# EAGLE board Trefferzonenmodul (EAGLE 7.2.0)
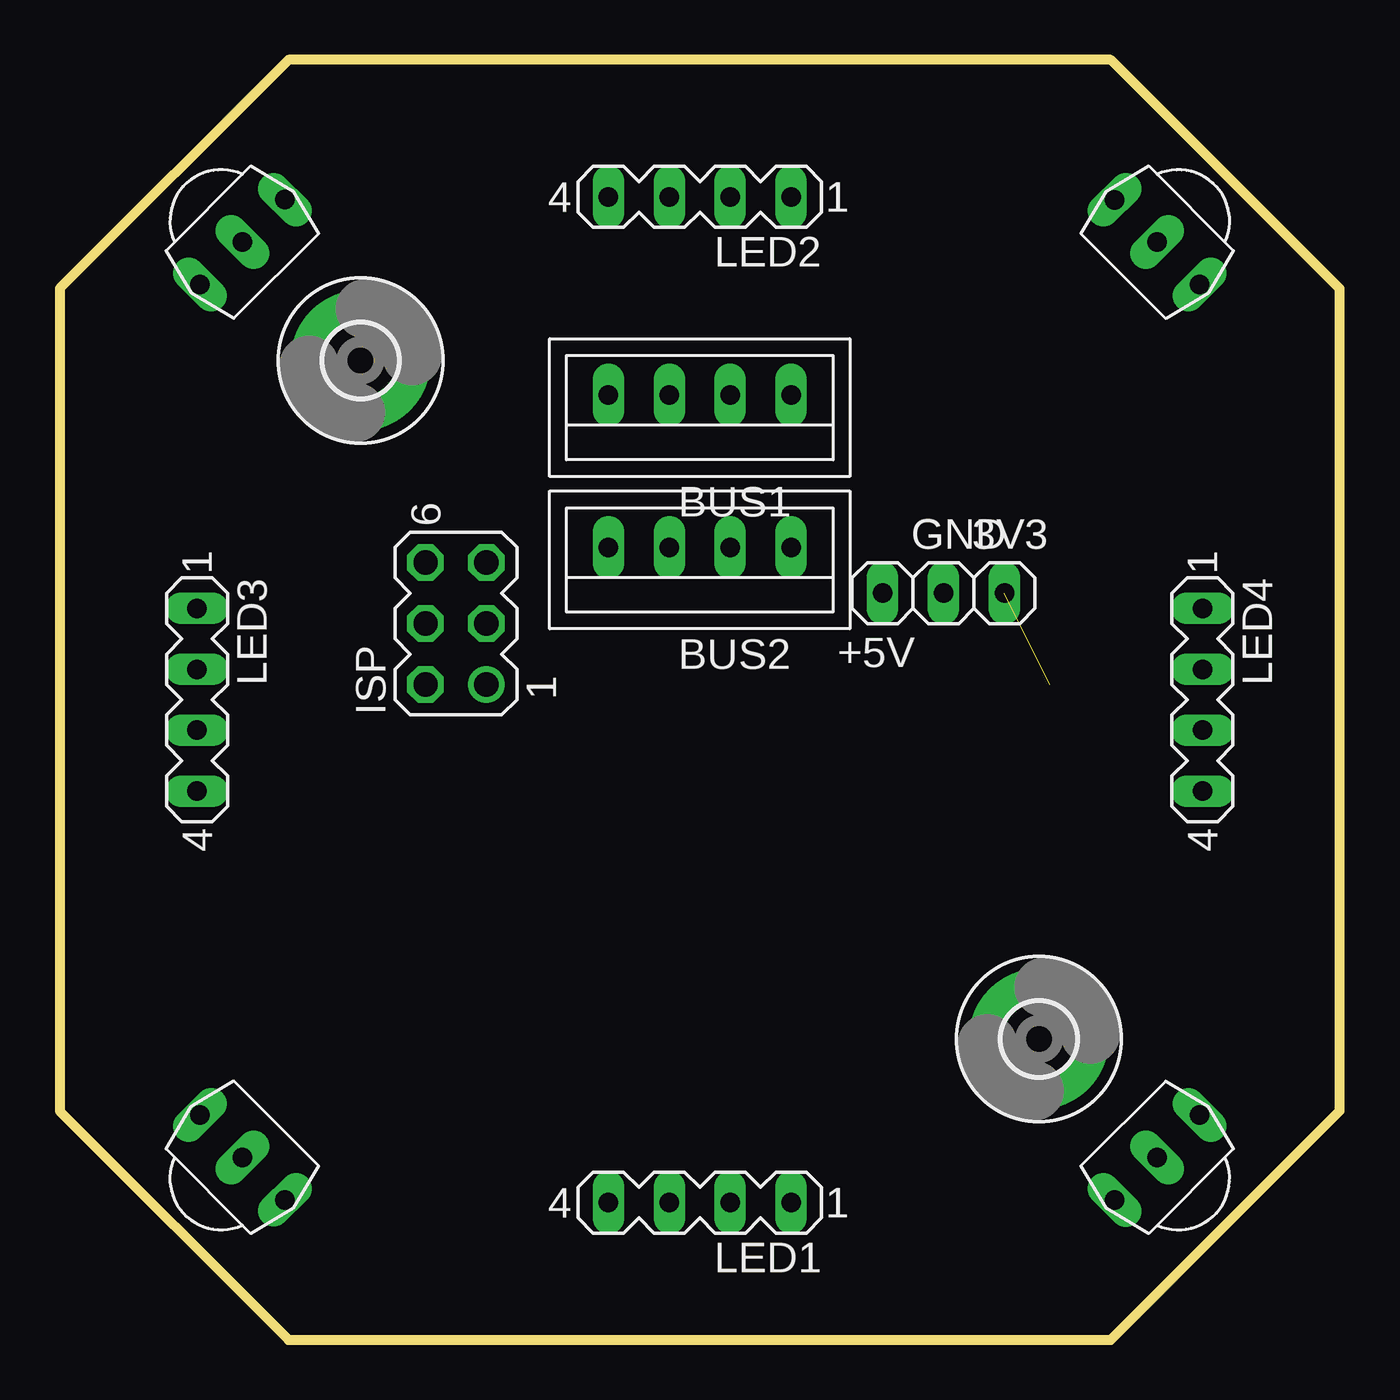
[diagram p0: board, top side]
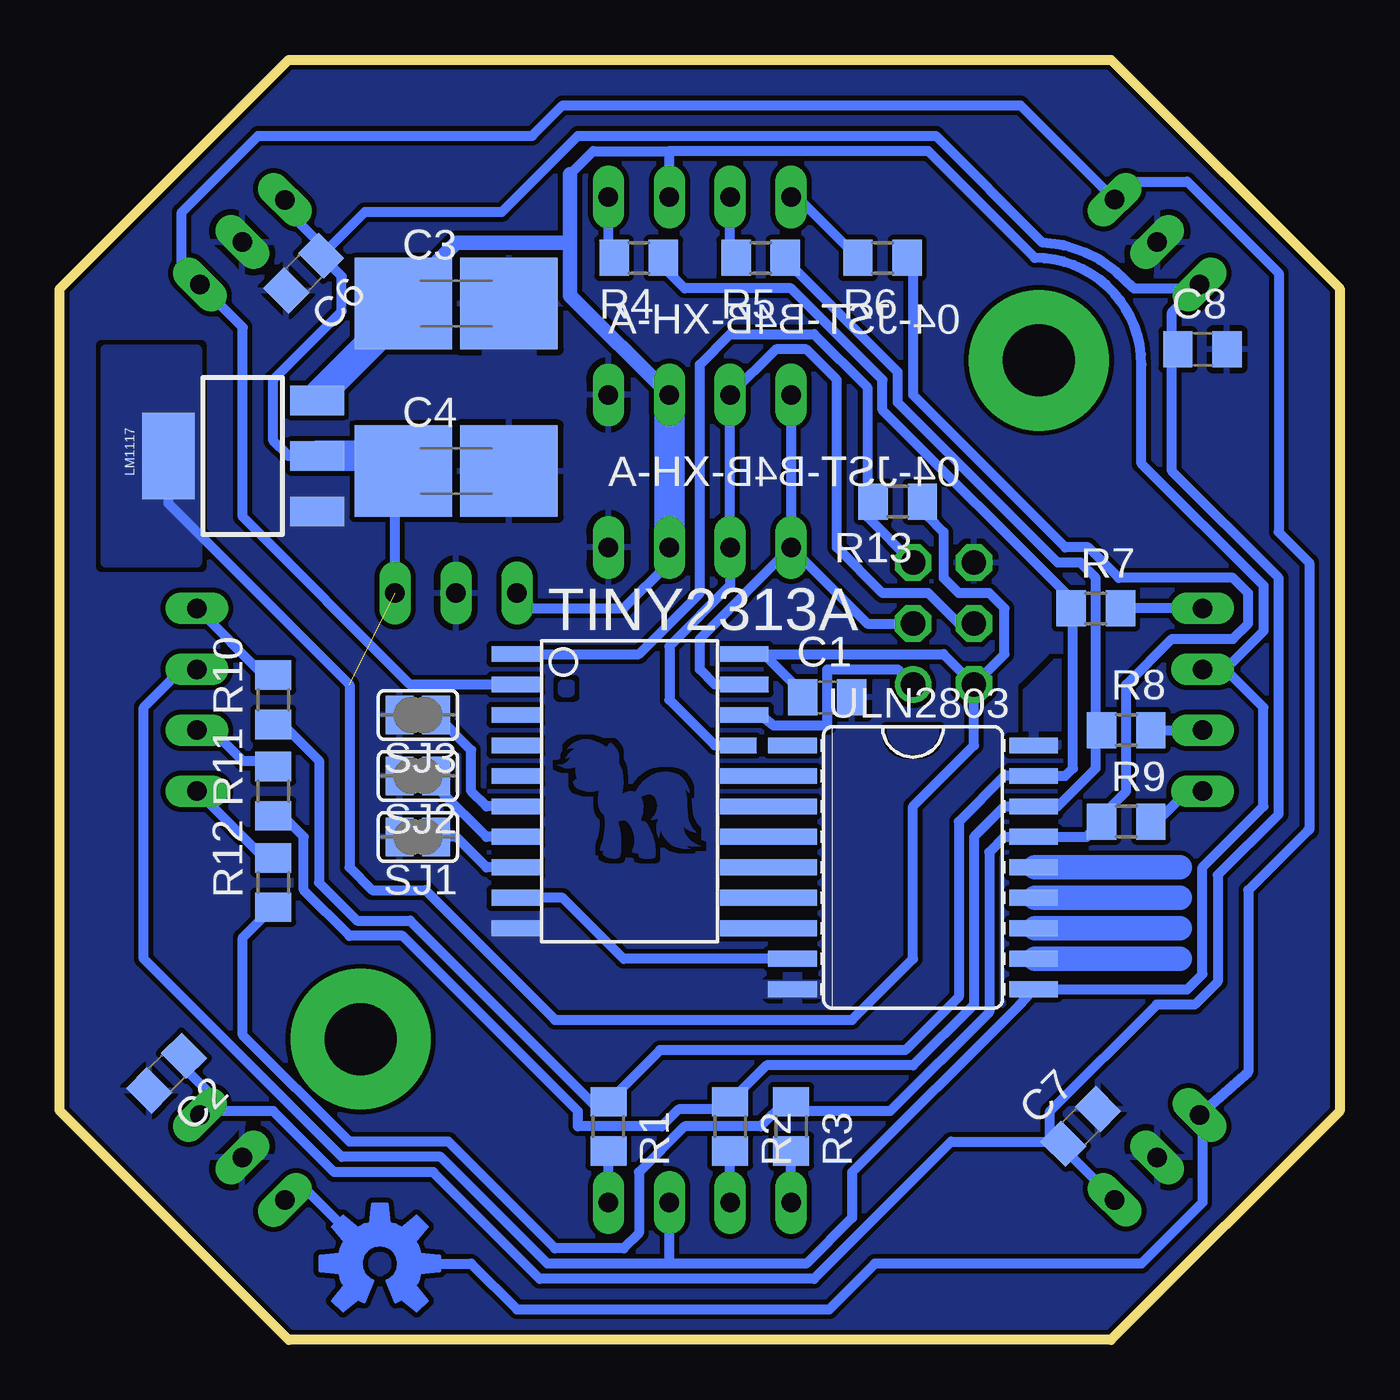
[diagram p1: board, bottom side, seen from below]

Size 53.34 x 53.33 mm. Coordinates in mm from the lower left corner, seen from the top.
Outline: 0,9.53 9.53,0 43.8,0 53.33,9.51 53.34,9.53 53.34,43.81 53.33,43.83 43.8,53.33 9.53,53.33 0,43.81 0,9.53
Copper layers (1*16): Top 0.035mm / dielectric 1.5mm / Bottom 0.035mm
Design rules "cnc *": minimum track width 10mil, minimum drill 0.1mm, track to track 8mil, track to pad 8mil, pad to pad 8mil, via to via 8mil, smd to smd 8mil, copper to edge 8mil, drill to drill 8mil, minimum pad ring 10mil, minimum via ring 8mil, stop-mask expansion 4mil, vias tented up to drill 0mil, thermal gap 10mil
Net classes: 0 default: width 0.016 mm

## Footprints (pad centres in the part's own frame; a part is rotated, then mirrored left to right if it is on the bottom)
1X01 = drill 0.813 long: 1 0,0
B4B-XH = drill 0.813 long: P$1 -3.81,0; P$2 -1.27,0; P$3 1.27,0; P$4 3.81,0
C0805 = smd 1.224 x 1.5: 1 -1.026,0; 2 1.026,0
C1808 = smd 4.064 x 3.81: 1 -2.204,0; 2 2.204,0
3,0-PAD = drill 3 pad 5.842: B3,0 0,0
MA03-2 = drill 1.016: 1 -2.54,-1.27 | drill 1.016 octagon: 2 -2.54,1.27; 3 0,-1.27; 4 0,1.27; 5 2.54,-1.27; 6 2.54,1.27
MA04-1 = drill 0.813 long: 1 -3.81,0; 2 -1.27,0; 3 1.27,0; 4 3.81,0
SOT223 = smd 1.219 x 2.235: 1 -2.311,-3.099; 2 0,-3.099; 3 2.311,-3.099 | smd 3.6 x 2.2: 4 0,3.099
R0805 = smd 1.224 x 1.5: 1 -1.026,0; 2 1.026,0
SJ = smd 1.168 x 1.6: 1 -0.762,0; 2 0.762,0
SO20LVERSTUMMELT = smd 0.66 x 2.032: 1 -5.08,-5.131; 2 -3.81,-5.131; 3 -2.54,-5.131; 4 -1.27,-5.131; 5 0,-5.131; 6 1.27,-5.131; 7 2.54,-5.131; 8 3.81,-5.131; 9 5.08,-5.131; 10 6.35,-5.131; 11 6.35,4.394; 12 5.08,4.394; 13 3.81,4.394; 14 2.54,4.394; 15 1.27,4.394; 16 0,4.394; 18 -2.54,4.394; 19 -3.81,4.394; 20 -5.08,4.394 | smd 0.66 x 1.524: 17 -1.27,4.14
TSOP18XX = drill 0.813 long: GND -0.001,-0.027; OUT -2.501,-0.027; VCC 2.499,-0.027
SO18W = smd 0.66 x 2.032: 1 -5.08,-5.029; 2 -3.81,-5.029; 3 -2.54,-5.029; 4 -1.27,-5.029; 5 0,-5.029; 6 1.27,-5.029; 7 2.54,-5.029; 8 3.81,-5.029; 9 5.08,-5.029; 10 5.08,5.029; 11 3.81,5.029; 12 2.54,5.029; 13 1.27,5.029; 14 0,5.029; 15 -1.27,5.029; 16 -2.54,5.029; 17 -3.81,5.029; 18 -5.08,5.029

## Placement (x,y rotation side)
3V3  [1X01]  39.37,31.11 0 top
+5V  [1X01]  34.29,31.11 180 top
BUS1  04-JST-B4B-XH-A  [B4B-XH]  26.67,39.37 180 top
BUS2  04-JST-B4B-XH-A  [B4B-XH]  26.67,33.02 180 top
C1  100n  [C0805]  21.36,26.77 0 bottom
C2  100n  [C0805]  48.9,11.11 225 bottom
C3  [C1808]  36.83,43.18 0 bottom
C4  [C1808]  36.83,36.2 0 bottom
C6  100n  [C0805]  43.18,44.45 225 bottom
C7  100n  [C0805]  10.79,8.89 45 bottom
C8  100n  [C0805]  5.71,41.27 0 bottom
GND  [1X01]  36.83,31.11 0 top
H1  MOUNT-PAD-ROUND3.0  [3,0-PAD]  12.53,40.81 0 top
H2  MOUNT-PAD-ROUND3.0  [3,0-PAD]  40.81,12.53 0 top
ISP  [MA03-2]  16.51,29.84 90 top
LED1  [MA04-1]  26.67,5.71 180 top
LED2  [MA04-1]  26.67,47.62 180 top
LED3  [MA04-1]  5.71,26.67 270 top
LED4  [MA04-1]  47.62,26.67 270 top
LM1117  V_REG_MIC2920  [SOT223]  45.72,36.83 90 bottom
LOGO2  OSHW-LOGOM  [OSHW-LOGO-M]  40.01,3.17 0 top
R1  100  [R0805]  30.48,8.89 270 bottom
R2  100  [R0805]  25.4,8.89 270 bottom
R3  100  [R0805]  22.86,8.89 270 bottom
R4  100  [R0805]  29.21,45.09 180 bottom
R5  100  [R0805]  24.13,45.09 180 bottom
R6  100  [R0805]  19.05,45.09 180 bottom
R7  100  [R0805]  10.16,30.48 0 bottom
R8  100  [R0805]  8.89,25.4 0 bottom
R9  100  [R0805]  8.89,21.59 0 bottom
R10  100  [R0805]  44.45,26.67 90 bottom
R11  100  [R0805]  44.45,22.86 90 bottom
R12  100  [R0805]  44.45,19.05 90 bottom
R13  10k  [R0805]  18.41,34.92 180 bottom
SJ1  [SJ]  38.42,20.95 180 bottom
SJ2  [SJ]  38.42,23.5 180 bottom
SJ3  [SJ]  38.42,26.04 180 bottom
TINY2313A  TINY2313A  [SO20LVERSTUMMELT]  29.21,23.5 270 bottom
U$1  TSOP1838  [TSOP18XX]  45.72,45.72 135 top
U$2  TSOP1838  [TSOP18XX]  7.62,45.72 225 top
U$3  TSOP1838  [TSOP18XX]  7.62,7.62 315 top
U$4  TSOP1838  [TSOP18XX]  45.72,7.62 45 top
ULN2803  [SO18W]  17.78,19.68 270 bottom

## Library data of the parts
3V3 +5V BUS1 BUS2 C1-C4 C6-C8 GND LM1117 LOGO2 R1-R13 TINY2313A ULN2803 = wz
H1 H2 = holes
ISP = con-lstb; OC_FARNELL: unknown; OC_NEWARK: unknown
LED1-LED4 = wz; OC_FARNELL: unknown; OC_NEWARK: unknown
SJ1-SJ3 = jumper
U$1-U$4 = tsop

## Nets
+3V3: 3V3.1 C1.1 C2.1 C4.1 C6.1 C7.1 C8.1 ISP.2 LM1117.2 LM1117.4 R13.1 TINY2313A.20 U$1.VCC U$2.VCC U$3.VCC U$4.VCC
+5V: +5V.1 BUS1.P$2 BUS2.P$2 C3.1 LED1.2 LED2.2 LED3.2 LED4.2 LM1117.3 ULN2803.10
FREI1: ULN2803.18
FREI5: ULN2803.14
FREI6: ULN2803.13
FREI7: ULN2803.12
GND: BUS1.P$1 BUS2.P$1 C1.2 C2.2 C3.2 C4.2 C6.2 C7.2 C8.2 GND.1 ISP.6 LM1117.1 SJ1.2 SJ2.2 SJ3.2 TINY2313A.10 U$1.GND U$2.GND U$3.GND U$4.GND ULN2803.9
HAPTIK: ULN2803.11
LED_B: R3.1 R6.1 R9.1 R12.1 ULN2803.15
LED_G: R2.1 R5.1 R8.1 R11.1 ULN2803.16
LED_R: R1.1 R4.1 R7.1 R10.1 ULN2803.17
N$1: ISP.1 TINY2313A.18
N$2: SJ1.1 TINY2313A.8
N$3: TINY2313A.16 ULN2803.2
N$4: TINY2313A.15 ULN2803.3
N$5: LED4.1 R10.2
N$6: LED4.3 R11.2
N$7: TINY2313A.14 ULN2803.4
N$8: TINY2313A.13 ULN2803.5
N$9: TINY2313A.12 ULN2803.6
N$10: TINY2313A.11 ULN2803.7
N$11: TINY2313A.9 ULN2803.8
N$12: LED4.4 R12.2
N$13: LED3.1 R7.2
N$14: LED3.3 R8.2
N$15: LED3.4 R9.2
N$16: LED2.1 R4.2
N$17: LED2.3 R5.2
N$18: SJ2.1 TINY2313A.7
N$19: SJ3.1 TINY2313A.6
N$22: LED2.4 R6.2
N$23: ISP.5 R13.2 TINY2313A.1
N$24: LED1.1 R1.2
N$25: LED1.3 R2.2
N$26: LED1.4 R3.2
RX: TINY2313A.2 U$1.OUT U$2.OUT U$3.OUT U$4.OUT
SCL: BUS1.P$4 BUS2.P$4 ISP.3 TINY2313A.19
SDA: BUS1.P$3 BUS2.P$3 ISP.4 TINY2313A.17

## Tracks (layer width: path | path; a pad name or v marks a point on that pad's centre or on a via)
+3V3  (1 unrouted)
  Bottom 0.406: LM1117.2 43.81,36.83 44.45,37.47 44.45,40.01 41.59,42.86 41.59,44.31 C6.1 | TINY2313A.20 24,28.57 | 24,28.57 16.51,28.57 ISP.2 | LM1117.4 48.82,34.85 41.27,27.3 41.27,19.68 40.32,18.73 38.1,18.73 32.7,13.34 20.32,13.34 17.78,15.88 17.78,22.23 15.24,24.77 ISP.2 | C4.1 38.57,35.09 39.37,34.92 3V3.1 | 12.06,8.26 16.19,8.26 21.91,2.54 33.34,2.54 37.78,6.99 41.91,6.99 44.45,9.53 47.35,9.53 U$4.VCC 46.99,9.88 46.99,10.16 48.17,11.34 C2.1 | 12.06,8.26 11.61,8.26 C7.1 | C7.1 11.97,8.16 12.06,8.26 | 12.06,8.26 12.06,9.53 7.62,13.97 6.03,13.97 5.08,14.92 5.08,19.37 2.54,21.91 2.54,31.75 6.99,36.2 6.99,41.46 | C7.1 11.52,7.99 U$3.VCC | C6.1 42.45,45.63 43.81,46.99 43.81,47.35 U$1.VCC | C6.1 40.64,46.99 34.92,46.99 31.75,50.16 16.83,50.16 12.38,45.72 11.5,45.6 10.6,45.3 10,45 9.3,44.5 8.57,43.81 5.99,43.81 U$2.VCC 6.99,42.82 6.99,41.46 | ISP.2 13.97,28.57 13.97,30.48 14.61,31.11 15.88,31.11 16.51,31.75 16.51,33.66 17.14,34.29 17.14,34.68 R13.1 | C1.1 22.7,27.28 24,28.57 | 6.99,41.46 C8.1
  Bottom 1.27: LM1117.2 40.01,36.83 39.03,35.86 C4.1
  pour Bottom (no thermals): 47.62,41.27 47.62,32.38 51.44,32.38 51.44,41.27
+5V
  Bottom 0.406: 27.94,3.17 22.23,3.17 20.32,5.08 20.32,6.99 13.34,13.97 ULN2803.10 6.35,14.61 5.71,15.24 5.71,19.68 3.17,22.23 3.17,26.35 4.76,27.94 | 27.94,3.17 LED1.2 | LED2.2 27.94,49.53 | 27.94,49.53 17.14,49.53 12.7,45.09 arc90 8.26,40.64 8.26,36.51 3.17,31.43 3.17,29.53 4.76,27.94 | C3.1 40.13,41.78 37.47,42.55 38.1,44.45 | 32.07,48.58 31.11,49.53 27.94,49.53 | LED4.2 48.26,27.94 49.85,26.35 49.85,15.88 41.59,7.62 37.47,7.62 33.02,3.17 27.94,3.17 | 4.76,27.94 LED3.2 | LM1117.3 42.62,39.29 | +5V.1 33.66,30.48 29.84,30.48 27.94,32.38 BUS2.P$2
  Bottom 0.61: 38.1,44.45 36.83,45.72 32.07,45.72 | 32.07,45.72 32.07,48.58 | 32.07,45.72 32.07,43.5 BUS1.P$2
  Bottom 1.27: 42.62,39.29 40.13,41.78 | BUS2.P$2 BUS1.P$2
FREI1
  pour Bottom (isolate 0.264): 11.75,24.77 11.75,28.26 13.02,26.99 13.02,24.77
GND
  pour Bottom (rank 6): 0,43.81 9.53,53.34 43.81,53.34 53.34,43.81 53.34,9.53 43.81,0 9.53,0 0,9.53
  pour Bottom (no thermals): 40.64,36.2 45.09,36.2 45.09,32.38 40.64,32.38
  pour Bottom: 20.95,15.24 24.77,15.24 24.77,13.97 20.95,13.97
  pour Bottom (no thermals): 33.02,18.41 36.2,18.41 36.2,16.51 33.02,16.51
  pour Bottom (no thermals): 33.66,41.91 35.56,41.91 35.56,40.64 33.66,40.64
LED_B
  Bottom 0.406: R12.1 45.72,16.75 45.72,12.7 41.27,8.26 37.15,8.26 32.7,3.81 29.84,3.81 29.21,4.45 29.21,6.99 27.3,8.89 24.13,8.89 23.1,9.92 R3.1 22.62,9.53 18.73,9.53 14.61,13.65 14.61,20.32 13.97,20.95 ULN2803.15 10.55,20.95 R9.1 9.92,21.83 8.89,22.86 8.89,27.3 6.99,29.21 4.45,29.21 3.81,29.84 3.81,31.11 4.45,31.75 9.21,31.75 10.48,33.02 11.43,33.02 17.78,39.37 17.78,44.84 R6.1
LED_G
  Bottom 0.406: 10.16,24.77 10.16,23.81 11.75,22.23 ULN2803.16 13.97,22.23 15.24,20.95 15.24,13.97 17.78,11.43 23.89,11.43 R2.1 25.72,9.84 26.11,9.6 27.55,9.6 28.26,8.89 31.75,8.89 31.75,9.53 39.05,16.83 41.27,16.83 43.18,18.73 43.18,20.95 44.06,21.83 R11.1 | 10.16,24.77 10.16,31.75 10.79,32.38 11.75,32.38 18.41,39.05 18.41,40.32 22.54,44.45 23.1,44.69 R5.1 | R8.1 10.16,24.77
LED_R
  Bottom 0.406: 11.19,30.72 11.19,30.87 19.05,38.73 19.05,40.01 22.86,43.81 27.3,43.81 28.18,44.69 R4.1 27.94,45.09 | 30.72,9.53 30.8,9.53 38.73,17.46 40.96,17.46 42.55,19.05 42.55,24.13 44.06,25.64 R10.1 | 30.48,9.53 30.72,9.53 | 30.72,9.53 R1.1 28.33,12.06 18.1,12.06 15.88,14.29 15.88,21.59 13.97,23.5 ULN2803.17 11.43,23.5 11.11,23.81 11.11,30.16 11.19,30.72 | R7.1 11.19,30.72
N$1
  Bottom 0.406: TINY2313A.18 24.13,26.04 23.59,25.6 21.36,25.6 21.36,27.94 18.41,27.94 ISP.1
N$2
  Bottom 0.406: TINY2313A.8 35.56,19.68 36.83,20.95 SJ1.1
N$3
  Bottom 0.406: ULN2803.2 TINY2313A.16
N$4
  Bottom 0.406: ULN2803.3 TINY2313A.15
N$5
  Bottom 0.406: R10.2 44.84,27.7 LED4.1
N$6
  Bottom 0.406: LED4.3 46.99,25.4 45.72,24.13 44.69,24.13 R11.2
N$7
  Bottom 0.406: ULN2803.4 TINY2313A.14
N$8
  Bottom 0.406: ULN2803.5 TINY2313A.13
N$9
  Bottom 0.406: ULN2803.6 TINY2313A.12
N$10
  Bottom 0.406: ULN2803.7 TINY2313A.11
N$11
  Bottom 0.406: ULN2803.8 29.84,15.88 32.38,18.41 TINY2313A.9
N$12
  Bottom 0.406: R12.2 44.84,20.08 LED4.4
N$13
  Bottom 0.406: LED3.1 R7.2
N$14
  Bottom 0.406: R8.2 LED3.3
N$15
  Bottom 0.406: R9.2 7.62,21.59 6.35,22.86 LED3.4
N$16
  Bottom 0.406: R4.2 30.24,45.48 30.48,45.72 LED2.1
N$17
  Bottom 0.406: R5.2 25.16,44.84 25.4,45.72 LED2.3
N$18
  Bottom 0.406: TINY2313A.7 35.56,20.95 37.47,22.86 37.47,23.05 SJ2.1 37.34,22.73
N$19
  Bottom 0.406: TINY2313A.6 35.56,22.23 36.2,22.86 36.2,24.57 SJ3.1
N$21
  Bottom 1.016: 12.7,19.68 6.67,19.68
N$22
  Bottom 0.406: R6.2 22.62,47.62 LED2.4
N$23
  Bottom 0.406: TINY2313A.1 29.21,28.57 26.67,31.11 26.67,40.64 25.4,41.91 21.91,41.91 19.68,39.69 19.68,34.92 | 19.68,34.92 19.68,34.29 ISP.5 | R13.2 19.68,34.92
N$24
  Bottom 0.406: LED1.1 R1.2
N$25
  Bottom 0.406: LED1.3 R2.2
N$26
  Bottom 0.406: LED1.4 R3.2
N$27
  Bottom 1.016: 12.7,18.41 6.67,18.41
N$28
  Bottom 1.016: 12.7,17.14 6.67,17.14
N$29
  Bottom 1.016: 12.7,15.88 6.67,15.88
N$30
  pour Bottom: 225 corners
N$31
  pour Bottom: 32.07,27.3 32.38,27.3 32.38,26.99 32.07,26.99
N$32
  pour Bottom: 16.83,25.4 18.73,25.4 arc-90 17.78,24.55 arc-90
RX
  Bottom 0.406: TINY2313A.2 38.73,27.3 45.72,34.29 45.72,42.18 U$1.OUT 47.51,44.33 48.26,44.45 48.26,46.99 45.09,50.16 33.66,50.16 32.38,51.44 13.3,51.44 U$2.OUT 9.37,47.78 8.89,48.26 6.35,48.26 2.54,44.45 2.54,33.66 1.27,32.38 1.27,21.23 1.31,21.23 3.81,18.73 3.81,11.16 U$3.OUT 5.71,8.62 5.71,5.71 8.26,3.17 19.37,3.17 21.27,1.27 34.29,1.27 36.2,3.17 38.73,3.17 38.73,3.81 39.37,4.45 41.27,4.45 43.18,6.35 43.7,5.83 U$4.OUT
SCL
  Bottom 0.406: ISP.3 19.68,29.84 BUS2.P$4 | TINY2313A.19 26.04,27.3 26.67,27.94 26.67,29.21 BUS2.P$4 | BUS1.P$4 BUS2.P$4
SDA
  Bottom 0.406: TINY2313A.17 26.04,24.77 27.94,26.67 27.94,28.89 25.4,31.43 BUS2.P$3 BUS1.P$3 23.5,41.27 22.23,41.27 20.95,40.01 20.95,33.02 19.05,31.11 17.14,31.11 15.88,29.84 ISP.4